# Altium PCB PCB7.PcbDoc
Units mil, origin at the board's own origin, x right, y up, seen from the top; angles counter-clockwise.
Board outline 2400 x 900 mil, 4 copper layers (Top Layer, Layer 1, Layer 2, Bottom Layer), stack 23.756 mil thick; 18 components, 9 nets, 90 pads, 26 vias.
Unrouted connection lines stored in the file: 21.
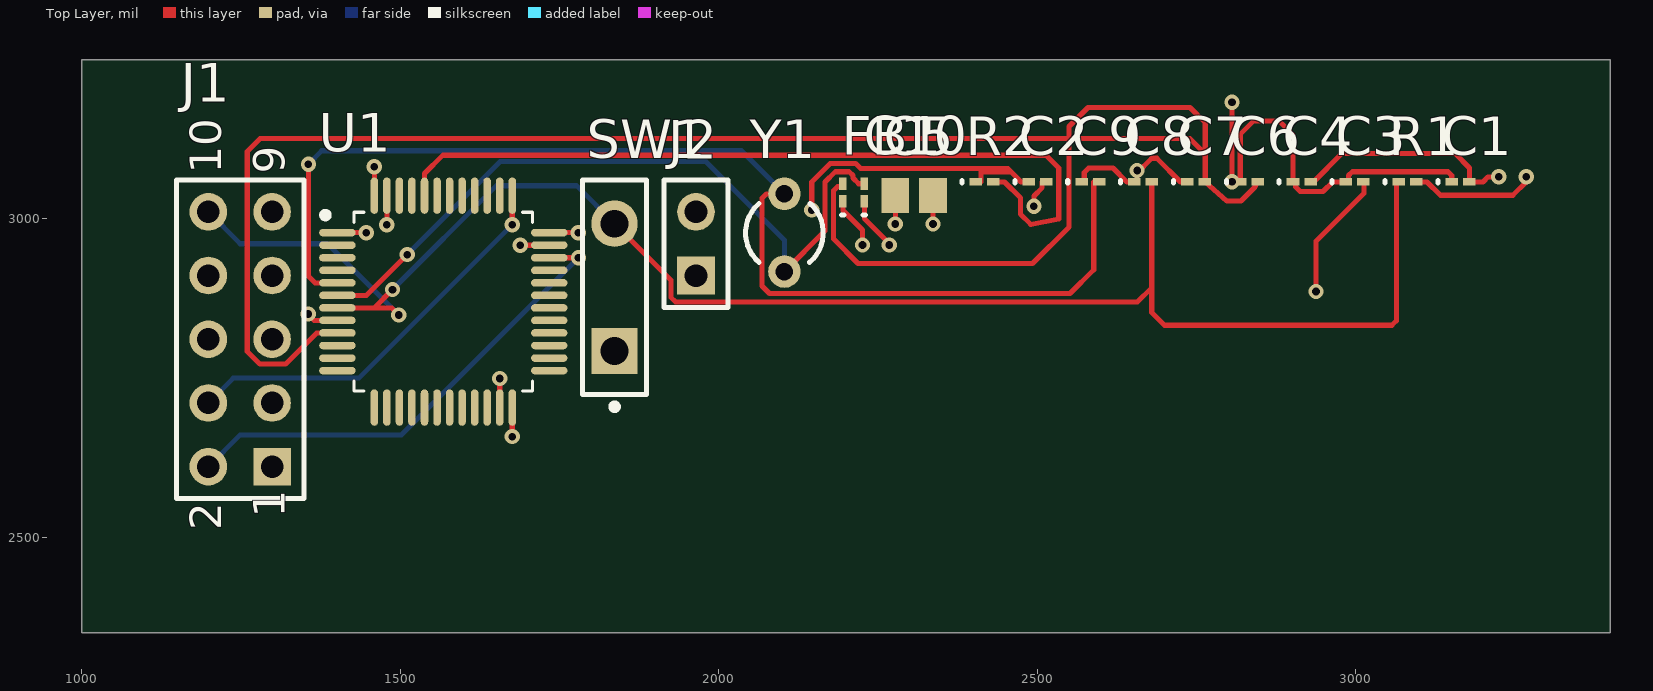
[diagram p0: Top Layer view]
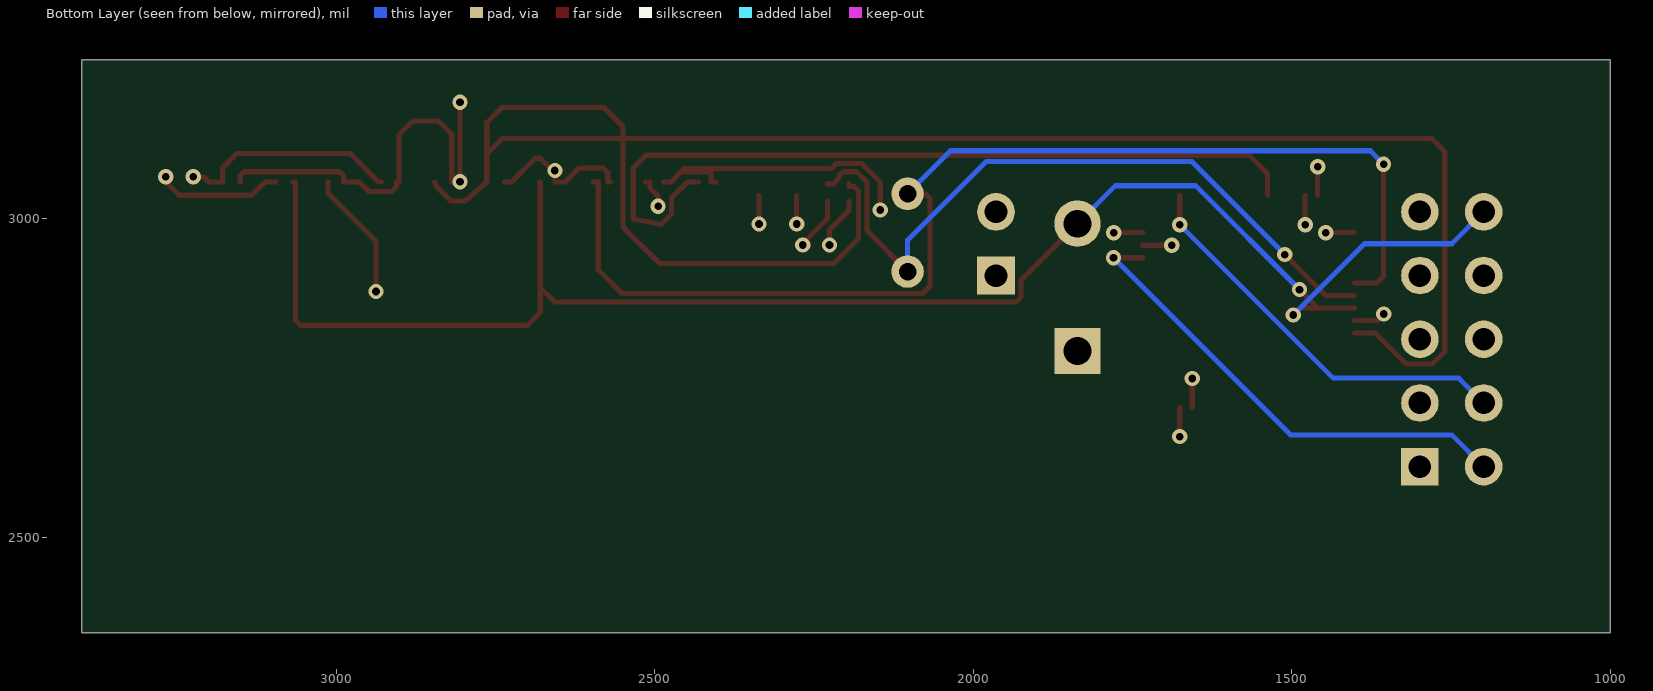
[diagram p1: Bottom Layer view, seen from below]
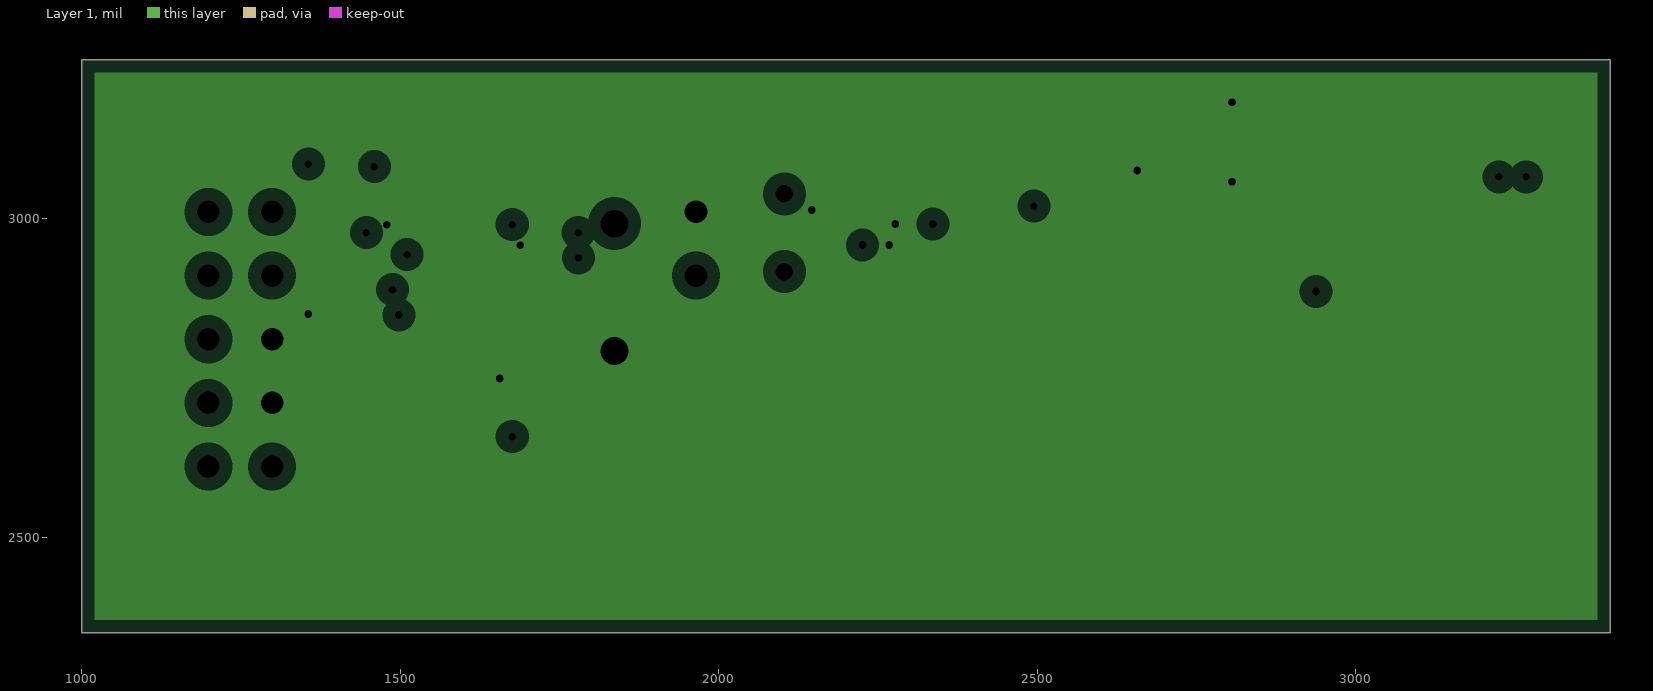
[diagram p2: Layer 1, clearances drawn from the general rule]
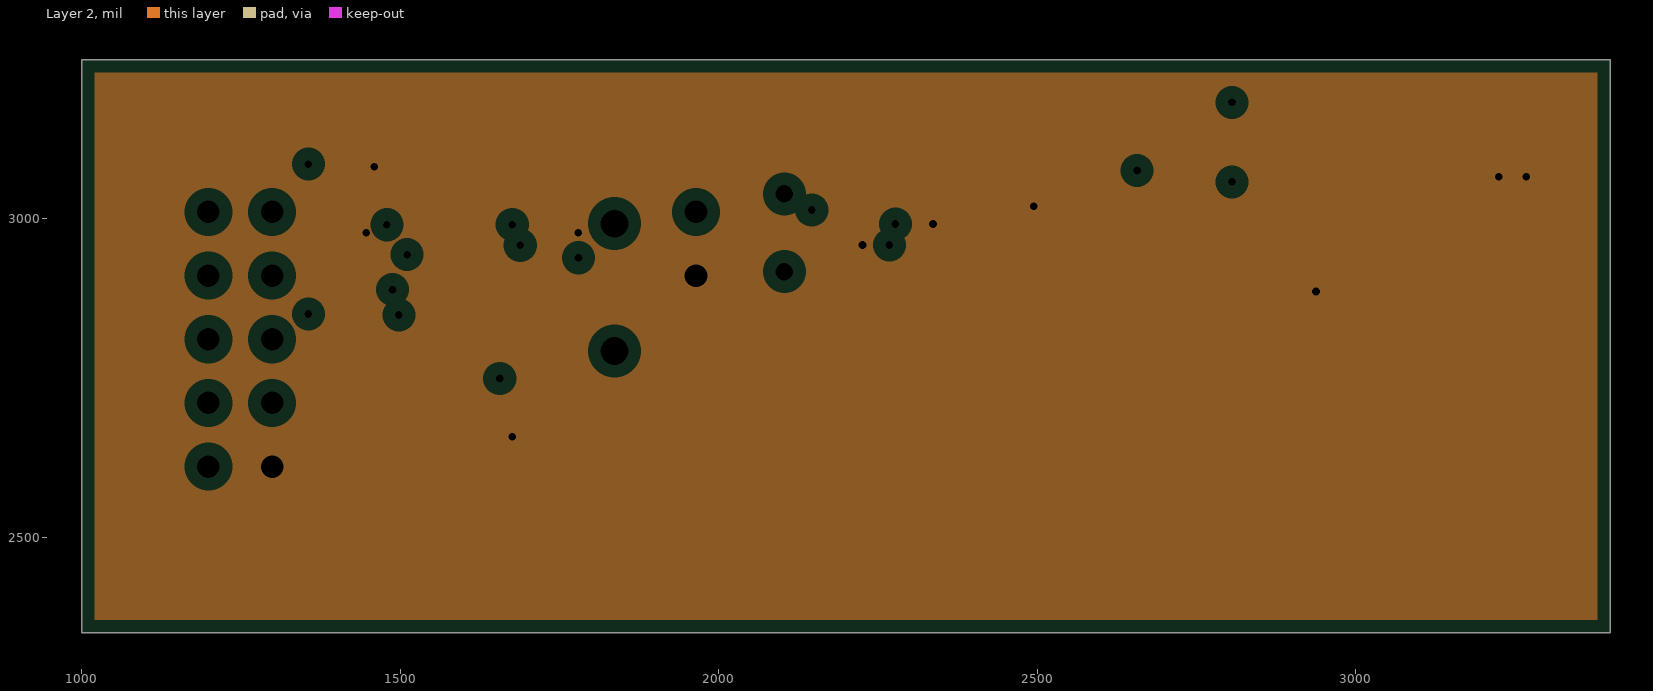
[diagram p3: Layer 2, clearances drawn from the general rule]

## Layer stack, top to bottom
Top Solder: solder mask 0.4, Solder Resist, Dk 3.5
Top Layer: signal copper 1.4
Dielectric 2: prepreg 2.8, PP-006, Dk 4.1
Layer 1: plane copper 1.378, net GND
Dielectric 1: dielectric 12.6, FR-4, Dk 4.8
Layer 2: plane copper 1.378, net 3V3
Dielectric 3: prepreg 2.8, PP-006, Dk 4.1
Bottom Layer: signal copper 1.4
Bottom Solder: solder mask 0.4, Solder Resist, Dk 3.5

## Board outline
1000,2350 3400,2350 3400,3250 1000,3250

## Design rules (kind name [scope] priority, off if disabled: settings)
Clearance [All] p1: gap=5 ignorepadtopadclearanceinfootprint=FALSE
HoleSize [All] p1: absolutevalues=TRUE maxlimit=250 minlimit=8 maxpercent=80.000 minpercent=20.000
MinimumSolderMaskSliver [All] p1: minsoldermaskwidth=4
PlaneClearance [All] p1: clearance=20
PlaneConnect [All] p1: planeconnectstyle=Relief reliefexpansion=20 reliefentries=4 reliefconductorwidth=10 reliefairgap=10
PolygonConnect [All] p1: connectstyle=Relief reliefconductorwidth=10 reliefentries=4 polygonreliefangle="90 Angle" airgapwidth=10
RoutingVias [All] p1: holewidth=12 width=24 viastyle="Through Hole" minholewidth=8 minwidth=16 maxholewidth=20 maxwidth=40
SolderMaskExpansion [All] p1: expansion=0 istentingtop=FALSE
SupplyNets "Schematic Supply Nets" [InNet('GND')] p1: voltage=0.000
Width [All] p1: maxlimit=50 minlimit=5 preferedwidth=8
26 further rules are at their usual default settings.

## Components (designator, comment, footprint, x,y, rotation, side; value= is the part's Value field where it differs from the comment)
C1 "Cap" 0603 3164.53,3058.11 r0 top value=100nF
C2 "Cap" 0603 2500.59,3058.11 r0 top value=100nF
C3 "Cap" 0603 2998.54,3058.11 r0 top value=100nF
C4 "Cap" 0603 2915.55,3058.11 r0 top value=100nF
C5 "Cap" C0805 2307.05,3036.46 r0 top value=4.7uF
C6 "Cap" 0603 2832.56,3058.11 r0 top value=1uF
C7 "Cap" 0603 2749.57,3058.11 r0 top value=100nF
C8 "Cap" 0603 2666.58,3058.11 r0 top value=100nF
C9 "Cap" 0603 2583.58,3058.11 r0 top value=22pF
C10 "Cap" 0603 2228.98,3041.38 r90 top value=22pF
FB1 "Inductor" 0603 2195.2,3041.38 r90 top value=10mH
J1 "Header 5X2" HDR2X5 1298.94,2611.06 r90 top
J2 "Header 2" HDR1X2 1964.45,2911.06 r90 top
R1 "Res1" 0603 3081.54,3058.11 r0 top value=10k
R2 "Res1" 0603 2417.6,3058.11 r0 top value=10k
SW1 "SW-PB" SPST-2 1836.57,2892.56 r90 top
U1 "STM32F103C8T6" LQFP48_7x7 1567.76,2870.12 r0 top
Y1 "XTAL" R38 2103.35,2978.39 r0 top

## Footprints (in the part's own frame and the unit in brackets; to place one, negate y for a bottom-side part, rotate by r counter-clockwise, add the part's x,y. Pads: shape width x height; smd on the part's side, far side on the other; paste and mask are expansions set on the pad)
0603 [mm] "Chip Inductor, Body 0.6x0.3mm, IPC High Density"
  rect 0.5x0.3 smd: 1(-0.35,0) 2(0.35,0)
  silkscreen extent -0.9,-0.05 -0.9,0.05, body extent -0.33,-0.18 0.33,0.18, height 0.55
C0805 [mm] "Chip Capacitor, Body 2.0x1.3mm, IPC High Density"
  rect 1.1x1.4 smd: 1(-0.75,0) 2(0.75,0)
  body extent -1.1,-0.72 1.1,0.72, height 1.4
HDR1X2 [mm] "Connector; Header; 2 Position"
  rect 1.5x1.5 hole 0.9: 1(0,0)
  round 1.5 hole 0.9: 2(2.54,0)
  silkscreen extent -1.27,-1.27 3.81,1.27
HDR2X5 [mm] "Connector; Header; 5x2 Position"
  rect 1.5x1.5 hole 0.9: 1(0,0)
  round 1.5 hole 0.9: 2(0,2.54) 3(2.54,0) 4(2.54,2.54) 5(5.08,0) 6(5.08,2.54) 7(7.62,0) 8(7.62,2.54) 9(10.16,0) 10(10.16,2.54)
  silkscreen extent -1.27,-1.27 11.43,3.81
LQFP48_7x7 [mm] "TSQFP, 48-Leads, Body 7.00x7.00mm, Pitch 0.50mm, IPC Medium Density"
  oval 1.45x0.3 smd: 1(-4.225,2.75) 2(-4.225,2.25) 3(-4.225,1.75) 4(-4.225,1.25) 5(-4.225,0.75) 6(-4.225,0.25) 7(-4.225,-0.25) 8(-4.225,-0.75) 9(-4.225,-1.25) 10(-4.225,-1.75) 11(-4.225,-2.25) 12(-4.225,-2.75) 25(4.225,-2.75) 26(4.225,-2.25) 27(4.225,-1.75) 28(4.225,-1.25) 29(4.225,-0.75) 30(4.225,-0.25) 31(4.225,0.25) 32(4.225,0.75) 33(4.225,1.25) 34(4.225,1.75) 35(4.225,2.25) 36(4.225,2.75)
  oval 0.3x1.45 smd: 13(-2.75,-4.225) 14(-2.25,-4.225) 15(-1.75,-4.225) 16(-1.25,-4.225) 17(-0.75,-4.225) 18(-0.25,-4.225) 19(0.25,-4.225) 20(0.75,-4.225) 21(1.25,-4.225) 22(1.75,-4.225) 23(2.25,-4.225) 24(2.75,-4.225) 37(2.75,4.225) 38(2.25,4.225) 39(1.75,4.225) 40(1.25,4.225) 41(0.75,4.225) 42(0.25,4.225) 43(-0.25,4.225) 44(-0.75,4.225) 45(-1.25,4.225) 46(-1.75,4.225) 47(-2.25,4.225) 48(-2.75,4.225)
  silkscreen extent -4.82,-3.56 3.56,3.57, body extent -3.5,-3.5 3.5,3.5, height 1.6
R38 [mm] "Crystal, Thru-Hole; 2 Leads; Body 3.1 x 8.2 mm (Dia.xH)"
  round 1.3 hole 0.7: 1(0,1.55) 2(0,-1.55)
  silkscreen extent -1.55,-1.19 1.55,1.17
SPST-2 [mm] "Switch; 2 Leads"
  rect 1.85x1.85 hole 1.1: 1(-2.54,0)
  round 1.85 hole 1.1: 2(2.54,0)
  silkscreen extent -4.89,-1.27 4.28,1.27

## Part data
C1 C2 C3 C4: "Capacitor 100 nF 0603 (desacople VDD/VBAT)", Manufacturer=KEMET, Manufacturer Part Number=C0603C104K5RACTU, LatestRevisionDate=17-Jul-2002, LatestRevisionNote="Re-released for DXP Platform.", PackageDescription="Radial Cap, Thru-Hole; 2 Leads; 0.3 in Pin Spacing", PackageReference=RAD-0.3, Published=8-Jun-2000, Publisher="Altium Limited"
C5: "Capacitor 4.7 uF 0805 (bulk)", Manufacturer=KEMET, Manufacturer Part Number=C0805C475K8PACTU, LatestRevisionDate=17-Jul-2002, LatestRevisionNote="Re-released for DXP Platform.", PackageDescription="Radial Cap, Thru-Hole; 2 Leads; 0.3 in Pin Spacing", PackageReference=RAD-0.3, Published=8-Jun-2000, Publisher="Altium Limited"
C6: "Capacitor 1 uF 0603 (VDDA)", Manufacturer=KEMET, Manufacturer Part Number=C0603C105K8RACTU, LatestRevisionDate=17-Jul-2002, LatestRevisionNote="Re-released for DXP Platform.", PackageDescription="Radial Cap, Thru-Hole; 2 Leads; 0.3 in Pin Spacing", PackageReference=RAD-0.3, Published=8-Jun-2000, Publisher="Altium Limited"
C7: "Capacitor 100 nF 0603 (VDDA)", Manufacturer=KEMET, Manufacturer Part Number=C0603C104K5RACTU, LatestRevisionDate=17-Jul-2002, LatestRevisionNote="Re-released for DXP Platform.", PackageDescription="Radial Cap, Thru-Hole; 2 Leads; 0.3 in Pin Spacing", PackageReference=RAD-0.3, Published=8-Jun-2000, Publisher="Altium Limited"
C8: "Capacitor 100 nF 0603 (filtro NRST)", Manufacturer=KEMET, Manufacturer Part Number=C0603C104K5RACTU, LatestRevisionDate=17-Jul-2002, LatestRevisionNote="Re-released for DXP Platform.", PackageDescription="Radial Cap, Thru-Hole; 2 Leads; 0.3 in Pin Spacing", PackageReference=RAD-0.3, Published=8-Jun-2000, Publisher="Altium Limited"
C9 C10: "Capacitor 22 pF 0603 (carga cristal)", Manufacturer=KEMET, Manufacturer Part Number=C0603C220J5GACTU, LatestRevisionDate=17-Jul-2002, LatestRevisionNote="Re-released for DXP Platform.", PackageDescription="Radial Cap, Thru-Hole; 2 Leads; 0.3 in Pin Spacing", PackageReference=RAD-0.3, Published=8-Jun-2000, Publisher="Altium Limited"
FB1: "Ferrite bead 120 ohm @100 MHz 0603 (VDD -> VDDA)", Manufacturer=Murata, Manufacturer Part Number=BLM18PG121SN1D, Code_IEC=1005, Code_JEITA=0402, LatestRevisionDate=29-May-2009, LatestRevisionNote="IPC-7351 Footprint Added.", PackageDescription="Chip Inductor", PackageReference=0402-A, Published=8-Jun-2000, Publisher="Altium Limited"
J1: "Header 2x5 SWD: 3V3, SWDIO, SWCLK, GND, NRST", Manufacturer=Generic, Manufacturer Part Number="Pin header 2x5 2.54 mm", LatestRevisionDate=17-Jul-2002, LatestRevisionNote="Re-released for DXP Platform.", Publisher="Altium Limited"
J2: "Header 2 pin: alimentacion 3V3 y GND", Manufacturer=Generic, Manufacturer Part Number="Pin header 1x2", LatestRevisionDate=17-Jul-2002, LatestRevisionNote="Re-released for DXP Platform.", Publisher="Altium Limited"
R1: "Resistor 10 kohm 0603 (pull-up NRST)", Manufacturer=Yageo, Manufacturer Part Number=RC0603FR-0710KL, LatestRevisionDate=17-Jul-2002, LatestRevisionNote="Re-released for DXP Platform.", PackageDescription="Axial Device, Thru-Hole; 2 Leads; 0.3 in Pin Spacing", PackageReference=AXIAL-0.3, Published=8-Jun-2000, Publisher="Altium Limited"
R2: "Resistor 10 kohm 0603 (pull-down BOOT0)", Manufacturer=Yageo, Manufacturer Part Number=RC0603FR-0710KL, LatestRevisionDate=17-Jul-2002, LatestRevisionNote="Re-released for DXP Platform.", PackageDescription="Axial Device, Thru-Hole; 2 Leads; 0.3 in Pin Spacing", PackageReference=AXIAL-0.3, Published=8-Jun-2000, Publisher="Altium Limited"
SW1: "Pulsador de reset", Manufacturer=Generic, Manufacturer Part Number="Tactile 6x6", LatestRevisionDate=17-Jul-2002, LatestRevisionNote="Re-released for DXP Platform.", PackageDescription="Switch; 2 Leads", PackageReference=SPST-2, Published=24-Mar-1999, Publisher="Altium Limited"
U1: "STM32F103C8T6 ARM Cortex-M3 72 MHz, 64 kB Flash, 20 kB RAM, LQFP48", Manufacturer=STMicroelectronics, Manufacturer Part Number=STM32F103C8T6
Y1: "Crystal 8 MHz, CL=20 pF", Manufacturer=Abracon, Manufacturer Part Number=ABL-8.000MHZ-B2, LatestRevisionDate=17-Jul-2002, LatestRevisionNote="Re-released for DXP Platform.", PackageDescription="Crystal, Thru-Hole; 2 Leads; Body 3.1 x 8.2 mm (Dia.xH)", PackageReference=R38, Published=8-Jun-2000, Publisher="Altium Limited"

## Via types
v1: diameter 24, hole 12, Top Layer to Bottom Layer, 26 vias

## Nets (pads, with @x,y where several pads share a name; then routed paths per layer and width w, separated by ;. In a path a pad name is that pad's centre, name@x,y a point inside that pad or via, vN(x,y) a via of type N, cw(c..) or ccw(c..) an arc to the next point about the centre after c; other vN are vias at no path point)
3V3: C1.2 C2.2 C3.2 C4.2 C5.2 FB1.1 J1.1 J2.1 R1.2 U1.1 U1.24 U1.36 U1.48 | length 1109.3
  Top Layer w8: U1.1 v1(1446.96,2978.39) ; U1.48 v1(1459.49,3082) ; v1(1676.02,2658.24) U1.24 ; U1.36 v1(1779.64,2978.39) ; FB1.1 2195.2,3013.24 2226,2982.44 v1(2226,2958.98) ; v1(2336.58,2991.9) C5.2 ; v1(2495,3020) 2495,3036 2508,3049 2508,3058.11 C2.2 ; C4.2 2934,3058.11 2978.89,3103 3156,3103 3179,3080 C1.2@3179,3058.11 ; v1(2938,2886) 2938,2965 3013,3040 3013,3058.11 C3.2 ; R1.2 3112.23,3058.11 3133.23,3037.11 3246.93,3037.11 3267.93,3058.11 v1(3267.93,3066) ; C1.2 C1.2@3179,3058.11 ; v1(3224.92,3066) 3208.02,3066 3200.13,3058.11 C1.2@3179,3058.11
BOOT0: R2.2 U1.44 | length 1276.8
  Top Layer w8: U1.44 1538.23,3071.23 1567,3100 2514,3100 2534,3080 2534,3000 2490,2991.46 2474,3007.46 2474,3033.11 2449,3058.11 R2.2
GND: C1.1 C2.1 C3.1 C4.1 C5.1 C6.1 C7.1 C8.1 C9.1 C10.1 J1.3 J1.5 J2.2 R2.1 SW1.1 U1.8 U1.23 U1.35 U1.47 | length 1706.8
  Top Layer w8: v1(1355.87,2850.59) 1355.87,2849.72 1365,2840.59 U1.8 ; v1(1479.17,2990.91) U1.47 ; U1.23 v1(1656.34,2749.32) ; v1(1688.55,2958.7) U1.35 ; v1(2146.2,3014) 2146.2,3058.11 2175.09,3087 2215.21,3087 2223.11,3079.11 2453.89,3079.11 2459,3074 ; C10.1 2228.98,3000.34 2268,2961.32 v1(2268,2958.98) ; v1(2277.52,2991.9) C5.1 ; R2.1 2412,3058.11 2412,3074 2459,3074 ; C2.1 2474.89,3058.11 2459,3074 ; C9.1 2574,3058.11 2574,3073 2581,3080 2619,3080 2640.89,3058.11 C8.1 2657,3058.11 2657,3072.26 2680,3095.26 2687.85,3095.26 2725,3058.11 C7.1 ; v1(2806,3183) v1(2806,3058.11) C6.1 2819,3058.11 2819,3133 2840,3154 2880,3154 2902,3132 C4.1@2902,3058.11 ; C4.1 C4.1@2902,3058.11 ; C1.1 3151,3058.11 3151,3068 3145,3074 2995,3074 2989,3068 2989,3058.11 C3.1 2964.11,3058.11 2949,3043 2913,3043 2906,3050 2906,3058.11 C4.1@2902,3058.11
  other v1: 2657,3076
NRST: C8.2 J1.10 R1.1 SW1.2 U1.7 | length 2690.5
  Top Layer w8: U1.7 1459.35,2860.28 ; v1(1488.07,2889) 1459.35,2860.28 ; v1(1498,2849.12) 1486.84,2860.28 1459.35,2860.28 ; SW1.2 1925,2904.13 1925,2877 1932.23,2869.77 2657.77,2869.77 2680,2892 ; C8.2 2680,3058.11 2680,2892 ; R1.1 3064,3058.11 3064,2840 3057,2833 2700,2833 2680,2853 2680,2892
  Bottom Layer w8: J1.10 1249,2961 1386.12,2961 v1(1498,2849.12) ; v1(1488.07,2889) 1651.07,3052 1777.13,3052 SW1.2
OSC_IN: C9.2 U1.5 Y1.1 | length 1873.5
  Top Layer w8: v1(1356,3086) 1356,2910 1366.35,2899.65 U1.5 ; Y1.1 2075,3039.41 2068,3032.41 2068,2894.77 2080,2882.77 2551.77,2882.77 2589,2920 2589,3058.11 C9.2
  Bottom Layer w8: v1(1356,3086) 1377,3107 2035.76,3107 Y1.1
OSC_OUT: C10.2 U1.6 Y1.2 | length 1134.9
  Top Layer w8: U1.6 1447,2879.96 v1(1511,2943.96) ; Y1.2 2167.2,2981.21 2167.2,3058 2183.2,3074 2205,3074 2211,3068 2211,3064.16 2220,3055.16 C10.2
  Bottom Layer w8: v1(1511,2943.96) 1657.04,3090 1980,3090 2103.35,2966.65 Y1.2
SWCLK: J1.4 U1.37 | length 638.5
  Top Layer w8: v1(1676.02,2991) U1.37
  Bottom Layer w8: J1.4 1237.87,2750 1435.02,2750 v1(1676.02,2991)
SWDIO: J1.2 U1.34 | length 762.8
  Top Layer w8: U1.34 v1(1780,2939)
  Bottom Layer w8: J1.2 1248.87,2661 1502,2661 v1(1780,2939)
VDDA: C6.2 C7.2 FB1.2 U1.9 | length 3108.7
  Top Layer w8: U1.9 1369,2820.91 1320.09,2772 1280,2772 1260,2792 1260,3106 1280,3126 2550,3126 ; FB1.2 2195.2,3051 2187,3051 2180.2,3044.2 2180.2,2968.8 2219,2930 2493,2930 2550,2987 2550,3126 ; C7.2 C7.2@2764,3058.11 ; C6.2 2842,3050 2820,3028 2798,3028 C7.2@2764,3058.11 ; 2550,3126 2550,3145 2580,3175 2740,3175 2764,3151 2764,3102 ; 2550,3126 2740,3126 2764,3102 ; C7.2@2764,3058.11 2764,3102
pads on no net: J1.6 J1.7 J1.8 J1.9 U1.2 U1.3 U1.4 U1.10 U1.11 U1.12 U1.13 U1.14 U1.15 U1.16 U1.17 U1.18 U1.19 U1.20 U1.21 U1.22 U1.25 U1.26 U1.27 U1.28 U1.29 U1.30 U1.31 U1.32 U1.33 U1.38 U1.39 U1.40 U1.41 U1.42 U1.43 U1.45 U1.46

## Polygon pours and split planes (outlines as drawn)
GND on Layer 1 (split plane): 3379.9,2370.1 1020.1,2370.1 1020.1,3229.9 3379.9,3229.9
3V3 on Layer 2 (split plane): 3379.9,2370.1 1020.1,2370.1 1020.1,3229.9 3379.9,3229.9

## Text inside footprints (layer, text, board x,y; h text height)
J1: Top Overlay "10" at 1218.94,3071.06 h50 r90; Top Overlay "9" at 1318.94,3071.06 h50 r90; Top Overlay "1" at 1318.94,2531.06 h50 r90; Top Overlay "2" at 1218.94,2511.06 h50 r90